# Altium PCB 6_LDCU_connector board(V21_zb).PcbDoc (part 1 of 4)
Units mil, origin at the board's own origin, x right, y up, seen from the top; angles counter-clockwise.
Board outline 11811.02 x 4135 mil, 2 copper layers (Top, Bottom), stack 12.7 mil thick; 37 components, 473 nets, 963 pads, 1 vias.
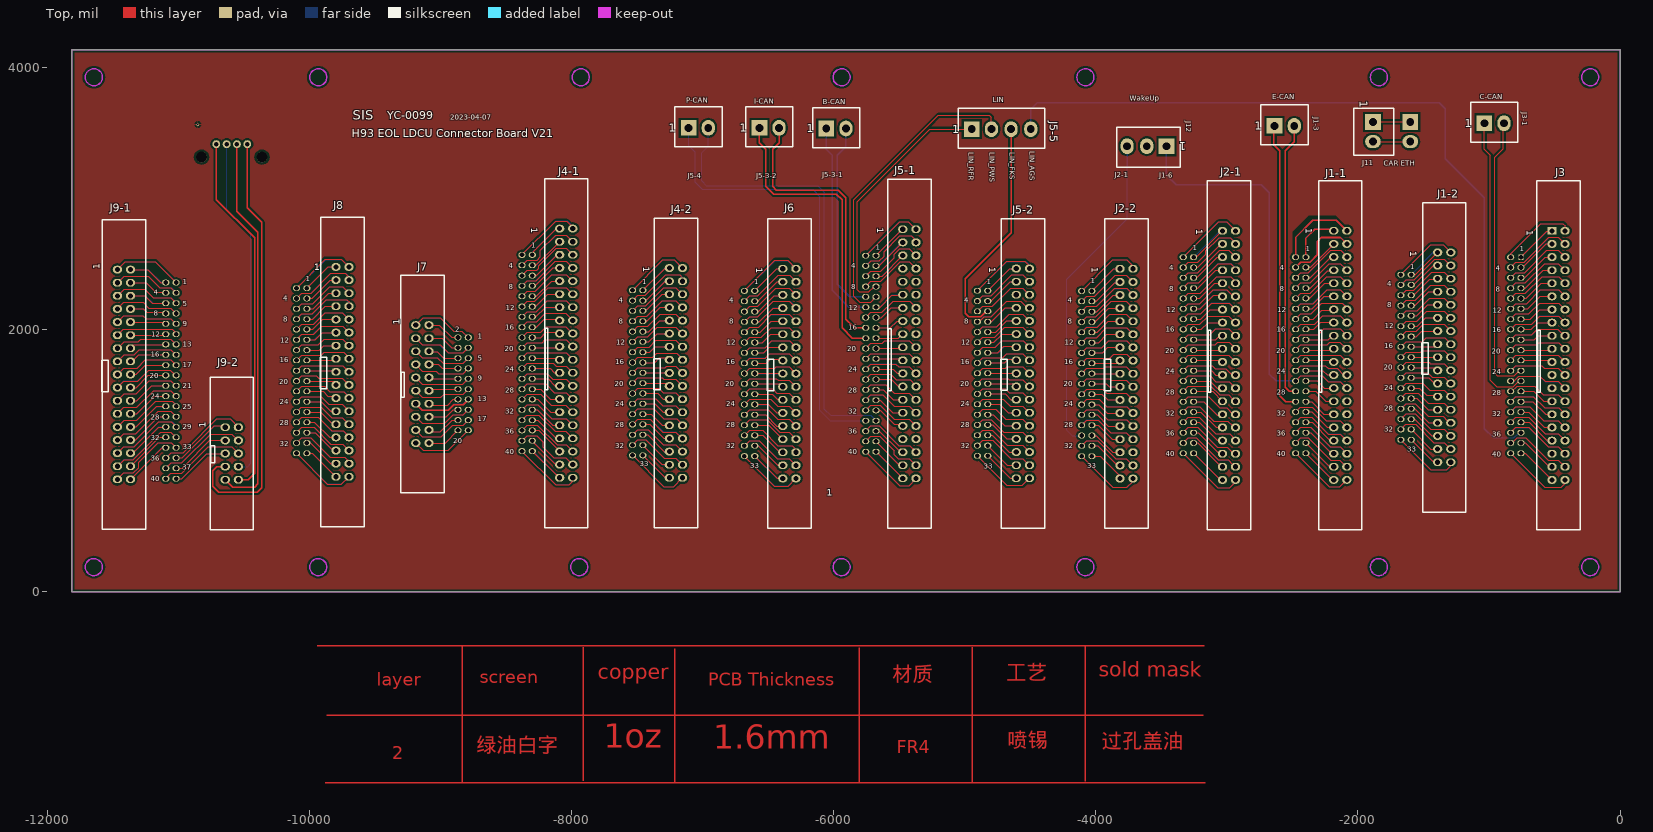
[diagram p0: Top view]
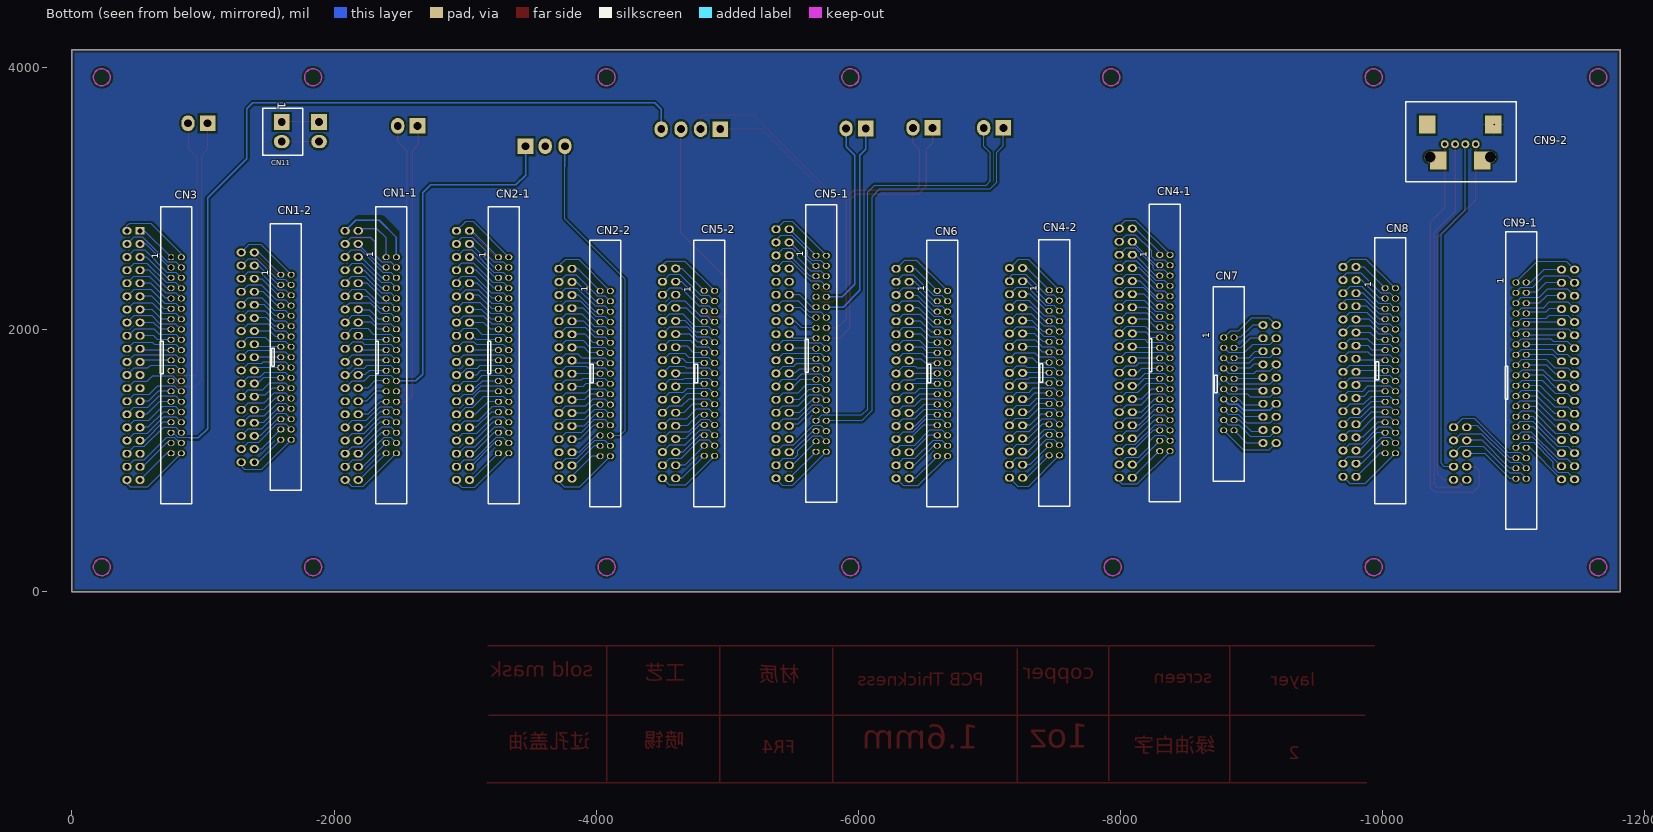
[diagram p1: Bottom view, seen from below]

## Layer stack, top to bottom
Top: signal copper 1.35
Dielectric: dielectric 10, FR-4, Dk 4.3
Bottom: signal copper 1.35

## Board outline
-11811.02,0 -11811.02,1320 -11811.02,4133.86 -11809.88,4135 -11716.02,4135 -1.14,4135 0,4133.86 0,4110 0,0 -61.02,0 -11811.02,0

## Design rules (kind name [scope] priority, off if disabled: settings)
Clearance "'Default' PADS rule_18" [All] p1: gap=6
Clearance "'Default' PADS rule_15" [IsVia vs IsVia] p2: gap=15
ComponentClearance "'Default' PADS rule_12" [All] p1: gap=6 collisioncheckmode=3 verticalgap=10 showdistances=FALSE
FlightTimeFalling "'Default' PADS rule_10" [All] p1: maximum=10.00
FlightTimeRising "'Default' PADS rule_9" [All] p1: maximum=10.00
Length "'Default' PADS rule_5" [All] p1: maxlimit=50000 minlimit=0
MatchedLengths "'Default' PADS rule_11" [InNetClass('All Nets')] p1: tolerance=200 checknetsindiffpair=TRUE checkdiffpairvsdiffpair=TRUE checkothers=TRUE
MaxMinImpedance "'Default' PADS rule_8" [All] p1: minimum=50.00 maximum=150.0
ParallelSegment "'Default' PADS rule_7" [All] p1: limit=1000 gap=200
ParallelSegment "'Default' PADS rule_6" [All] p2: limit=1000 gap=200
PlaneClearance "'Default' PADS rule_14" [All] p1: clearance=6
PlaneConnect "Power Plane Connect Style - pads with no thermal_22" [(Name='J5-4-3') Or (Name='J5-4-4') Or (Name='J5-4-9') Or (Name='J5-4-10') Or (Name='J5-5-3') Or (Name='J5-5-9') Or (Name='J5-5-10') Or (Name='U1-1') Or (Name='U10-1') Or (Name='U2-1') Or (Name='U3-1') Or (Name='U4-1') Or (Name='U5-1') Or (Name='U6-1') Or (Name='U7-1') Or (Name='U8-1') Or (Name='U9-1')] p1: planeconnectstyle=NoConnect reliefexpansion=20 reliefentries=4 reliefconductorwidth=10 reliefairgap=10 // PAD - No Thermal Connect Rule
PlaneConnect "Power Plane Connect Style - pads with no thermal_21" [(Name='J3-1-9') Or (Name='J3-1-10') Or (Name='J4-1-2') Or (Name='J4-1-4') Or (Name='J4-1-6') Or (Name='J4-1-8') Or (Name='J4-1-10') Or (Name='J4-1-12') Or (Name='J4-1-14') Or (Name='J4-1-16') Or (Name='J4-1-18') Or (Name='J4-1-20') Or (Name='J4-1-22') Or (Name='J4-1-24') Or (Name='J4-1-26') Or (Name='J4-1-28') Or (Name='J4-1-30') Or (Name='J4-1-32') Or (Name='J4-1-34') Or (Name='J4-1-36') Or (Name='J4-1-38') Or (Name='J4-1-40') Or (Name='J5-1-2') Or (Name='J5-1-4') Or (Name='J5-1-6') Or (Name='J5-1-8') Or (Name='J5-1-10') Or (Name='J5-1-12') Or (Name='J5-1-14') Or (Name='J5-1-16') Or (Name='J5-1-18') Or (Name='J5-1-20') Or (Name='J5-1-22') Or (Name='J5-1-24') Or (Name='J5-1-26') Or (Name='J5-1-28') Or (Name='J5-1-30') Or (Name='J5-1-32') Or (Name='J5-1-34') Or (Name='J5-1-36') Or (Name='J5-1-38') Or (Name='J5-1-40') Or (Name='J5-3-1') Or (Name='J5-3-2') Or (Name='J5-3-3') Or (Name='J5-3-4') Or (Name='J5-3-9') Or (Name='J5-3-10') Or (Name='J5-4-1')] p2: planeconnectstyle=NoConnect reliefexpansion=20 reliefentries=4 reliefconductorwidth=10 reliefairgap=10 // PAD - No Thermal Connect Rule
PlaneConnect "Power Plane Connect Style - pads with no thermal_20" [(Name='CN7-20') Or (Name='CN9-2-9') Or (Name='CN9-2-10') Or (Name='J11-9') Or (Name='J11-10') Or (Name='J1-3-1') Or (Name='J1-3-4') Or (Name='J1-3-9') Or (Name='J1-3-10') Or (Name='J2-1-2') Or (Name='J2-1-4') Or (Name='J2-1-6') Or (Name='J2-1-8') Or (Name='J2-1-10') Or (Name='J2-1-12') Or (Name='J2-1-14') Or (Name='J2-1-16') Or (Name='J2-1-18') Or (Name='J2-1-20') Or (Name='J2-1-22') Or (Name='J2-1-24') Or (Name='J2-1-26') Or (Name='J2-1-28') Or (Name='J2-1-30') Or (Name='J2-1-32') Or (Name='J2-1-34') Or (Name='J2-1-36') Or (Name='J2-1-38') Or (Name='J2-1-40') Or (Name='J3-2') Or (Name='J3-4') Or (Name='J3-6') Or (Name='J3-8') Or (Name='J3-10') Or (Name='J3-12') Or (Name='J3-14') Or (Name='J3-16') Or (Name='J3-18') Or (Name='J3-20') Or (Name='J3-22') Or (Name='J3-24') Or (Name='J3-26') Or (Name='J3-28') Or (Name='J3-30') Or (Name='J3-32') Or (Name='J3-34') Or (Name='J3-36') Or (Name='J3-38') Or (Name='J3-40') Or (Name='J3-1-1') Or (Name='J3-1-4')] p3: planeconnectstyle=NoConnect reliefexpansion=20 reliefentries=4 reliefconductorwidth=10 reliefairgap=10 // PAD - No Thermal Connect Rule
PlaneConnect "Power Plane Connect Style - pads with no thermal_19" [(Name='CN4-2-24') Or (Name='CN4-2-26') Or (Name='CN4-2-28') Or (Name='CN4-2-30') Or (Name='CN4-2-32') Or (Name='CN4-2-34') Or (Name='CN5-2-2') Or (Name='CN5-2-4') Or (Name='CN5-2-6') Or (Name='CN5-2-8') Or (Name='CN5-2-10') Or (Name='CN5-2-12') Or (Name='CN5-2-14') Or (Name='CN5-2-16') Or (Name='CN5-2-18') Or (Name='CN5-2-20') Or (Name='CN5-2-22') Or (Name='CN5-2-24') Or (Name='CN5-2-26') Or (Name='CN5-2-28') Or (Name='CN5-2-30') Or (Name='CN5-2-32') Or (Name='CN5-2-34') Or (Name='CN6-2') Or (Name='CN6-4') Or (Name='CN6-6') Or (Name='CN6-8') Or (Name='CN6-10') Or (Name='CN6-12') Or (Name='CN6-14') Or (Name='CN6-16') Or (Name='CN6-18') Or (Name='CN6-20') Or (Name='CN6-22') Or (Name='CN6-24') Or (Name='CN6-26') Or (Name='CN6-28') Or (Name='CN6-30') Or (Name='CN6-32') Or (Name='CN6-34') Or (Name='CN7-2') Or (Name='CN7-4') Or (Name='CN7-6') Or (Name='CN7-8') Or (Name='CN7-10') Or (Name='CN7-12') Or (Name='CN7-14') Or (Name='CN7-16') Or (Name='CN7-18')] p4: planeconnectstyle=NoConnect reliefexpansion=20 reliefentries=4 reliefconductorwidth=10 reliefairgap=10 // PAD - No Thermal Connect Rule
PlaneConnect "Power Plane Connect Style - pads with no thermal" [(Name='CN11-9') Or (Name='CN11-10') Or (Name='CN1-2-2') Or (Name='CN1-2-4') Or (Name='CN1-2-6') Or (Name='CN1-2-8') Or (Name='CN1-2-10') Or (Name='CN1-2-12') Or (Name='CN1-2-14') Or (Name='CN1-2-16') Or (Name='CN1-2-18') Or (Name='CN1-2-20') Or (Name='CN1-2-22') Or (Name='CN1-2-24') Or (Name='CN1-2-26') Or (Name='CN1-2-28') Or (Name='CN1-2-30') Or (Name='CN1-2-32') Or (Name='CN1-2-34') Or (Name='CN2-2-2') Or (Name='CN2-2-4') Or (Name='CN2-2-6') Or (Name='CN2-2-8') Or (Name='CN2-2-10') Or (Name='CN2-2-12') Or (Name='CN2-2-14') Or (Name='CN2-2-16') Or (Name='CN2-2-18') Or (Name='CN2-2-20') Or (Name='CN2-2-22') Or (Name='CN2-2-24') Or (Name='CN2-2-26') Or (Name='CN2-2-28') Or (Name='CN2-2-30') Or (Name='CN2-2-32') Or (Name='CN2-2-34') Or (Name='CN4-2-2') Or (Name='CN4-2-4') Or (Name='CN4-2-6') Or (Name='CN4-2-8') Or (Name='CN4-2-10') Or (Name='CN4-2-12') Or (Name='CN4-2-14') Or (Name='CN4-2-16') Or (Name='CN4-2-18') Or (Name='CN4-2-20') Or (Name='CN4-2-22')] p5: planeconnectstyle=NoConnect reliefexpansion=20 reliefentries=4 reliefconductorwidth=10 reliefairgap=10 // PAD - No Thermal Connect Rule
PlaneConnect "Power Plane Connect Style - from global settings" [All] p6: planeconnectstyle=Relief reliefexpansion=20 reliefentries=2 reliefconductorwidth=15 reliefairgap=10
PolygonConnect [All] p1: connectstyle=Relief reliefconductorwidth=10 reliefentries=4 polygonreliefangle="90 Angle"
RoutingLayers "'Default' PADS rule_3" [All] p1: top layer_v5=TRUE bottom layer_v5=TRUE
RoutingPriority "'Default' PADS rule_2" [All] p1: routingpriority=3
RoutingTopology "'Default' PADS rule" [All] p1: topology=Shortest
RoutingVias "'Default' PADS rule_4" [All] p1: holewidth=15.75 width=27.56 viastyle="Through Hole" minholewidth=15.75 minwidth=27.56 maxholewidth=15.75 maxwidth=27.56
SMDToCorner "'Default' PADS rule_16" [All] p1: distance=60000
SMDToPlane "'Default' PADS rule_17" [All] p1: distance=60000
SilkscreenOverComponentPads [All] p1: minsilkscreentomaskgap=10
SolderMaskExpansion [All] p1: expansion=4
Width "'Default' PADS rule_13" [All] p1: maxlimit=118.11 minlimit=6 preferedwidth=7.87
21 further rules are at their usual default settings.

## Components (designator, comment, footprint, x,y, rotation, side; value= is the part's Value field where it differs from the comment)
CN1-1 "IDC40-2.0" IDC40-2.0#1 -2436.81,2553.74 r270 bottom
CN1-2 "IDC34-2.0" IDC34-2.0 -1633.43,2420.35 r270 bottom
CN2-1 "IDC40-2.0" IDC40-2.0#1 -3293.66,2553.46 r270 bottom
CN2-2 "IDC34-2.0" IDC34-2.0 -4068.9,2295.35 r270 bottom
CN3 "IDC40-2.0" IDC40-2.0#2 -795.94,2553.46 r270 bottom
CN4-1 "IDC40-2.0" IDC40-2.0#1 -8337.87,2570.47 r270 bottom
CN4-2 "IDC34-2.0" IDC34-2.0 -7494.49,2301.02 r270 bottom
CN5-1 "IDC40-2.0" IDC40-2.0#1 -5716.1,2565.47 r270 bottom
CN5-2 "IDC34-2.0" IDC34-2.0 -4863.46,2297.36 r270 bottom
CN6 "IDC34-2.0" IDC34-2.0 -6640.83,2296.02 r270 bottom
CN7 "IDC20-2.0" IDC20-2.0 -8826.18,1940.83 r270 bottom
CN8 "IDC34-2.0" IDC34-2.0 -10057.68,2317.13 r270 bottom
CN9-1 "IDC40-2.0" IDC40-2.0#1 -11055.31,2360.12 r270 bottom
CN9-2 "34792002" 34792002 -10591.02,3315 r180 bottom
CN11 "Comment" 3.81mm-2 -1601.02,3585 r270 bottom
J1-1 "CON40A" CON40A#1 -2184.84,2754.53 r270 top
J1-2 "IDC34-2.54" IDC34-2.54 -1342.09,2589.65 r270 top
J1-3 "Comment" 3.81mm-2 -2636.02,3555 r0 top
J2-1 "CON40A" CON40A#1 -3033.82,2754.25 r270 top
J2-2 "IDC34-2.54" IDC34-2.54 -3765.75,2464.65 r270 top
J3 "CON40A" CON40A#2 -520.35,2754.25 r270 top
J3-1 "Comment" 3.81mm-2 -1036.02,3575 r0 top
J4-1 "CON40A" CON40A#1 -8089.84,2771.26 r270 top
J4-2 "IDC34-2.54" IDC34-2.54 -7203.15,2470.32 r270 top
J5-1 "CON40A" CON40A#1 -5472.01,2766.26 r270 top
J5-2 "IDC34-2.54" IDC34-2.54 -4556.38,2466.65 r270 top
J5-3-1 "Comment" 3.81mm-2 -6056.02,3535 r0 top
J5-3-2 "Comment" 3.81mm-2 -6566.02,3540 r0 top
J5-4 "Comment" 3.81mm-2 -7106.02,3540 r0 top
J5-5 "Comment" 3.81mm-4 -4946.02,3530 r0 top
J6 "IDC34-2.54" IDC34-2.54 -6337.68,2465.32 r270 top
J7 "IDC20-2.54" IDC20-2.54 -9137.2,2035.32 r270 top
J8 "IDC34-2.54" IDC34-2.54 -9746.65,2478.54 r270 top
J9-1 "IDC34-2.54" IDC34-2.54 -11413.58,2458.54 r270 top
J9-2 "IDC10-2.54" IDC10-2.54 -10590.75,1255.63 r270 top
J11 "Comment" 3.81mm-2 -1886.02,3585 r270 top
J12 "Comment" 3.81mm-3 -3461.02,3400 r180 top

## Footprints (in the part's own frame and the unit in brackets; to place one, negate y for a bottom-side part, rotate by r counter-clockwise, add the part's x,y. Pads: shape width x height; smd on the part's side, far side on the other; paste and mask are expansions set on the pad)
3.81mm-2 [mil]
  rect 120x120 hole 60: 1(0,0)
  oval 100x120 hole 60: 2(150,0)
  silkscreen extent -105,-145 255,160
3.81mm-3 [mil]
  rect 120x120 hole 60: 1(0,0)
  oval 100x120 hole 60: 2(150,0) 3(300,0)
  silkscreen extent -105,-145 381,160
3.81mm-4 [mil]
  rect 120x120 hole 60: 1(0,0)
  oval 100x120 hole 60: 2(150,0) 3(300,0) 4(450,0)
  silkscreen extent -105,-145 555,160
34792002 [mm]
  round 1.524 hole 0.889: 1(-3,2.55) 2(-1,2.55) 3(1,2.55) 4(3,2.55)
  rect 3.2x3.48 smd: 5(-4.25,-0.62) 6(4.25,-0.62) 7(-6.4,6.34) 8(6.4,6.34)
  round 2.16 / inner round 2 / far side round 2 hole 2.16 unplated: 9(-5.84,0.04) 10(5.85,0.04)
  silkscreen extent -10.59,-4.75 10.87,10.8
CON40A#1 [mm]
  oval 1.5x1.8 hole 1: 1(0,0) 2(0,2.54) 3(2.54,0) 4(2.54,2.54) 5(5.08,0) 6(5.08,2.54) 7(7.62,0) 8(7.62,2.54) 9(10.16,0) 10(10.16,2.54) 11(12.7,0) 12(12.7,2.54) 13(15.24,0) 14(15.24,2.54) 15(17.78,0) 16(17.78,2.54) 17(20.32,0) 18(20.32,2.54) 19(22.86,0) 20(22.86,2.54) 21(25.4,0) 22(25.4,2.54) 23(27.94,0) 24(27.94,2.54) 25(30.48,0) 26(30.48,2.54) 27(33.02,0) 28(33.02,2.54) 29(35.56,0) 30(35.56,2.54) 31(38.1,0) 32(38.1,2.54) 33(40.64,0) 34(40.64,2.54) 35(43.18,0) 36(43.18,2.54) 37(45.72,0) 38(45.72,2.54) 39(48.26,0) 40(48.26,2.54)
  silkscreen extent -9.66,-2.93 57.92,5.47
CON40A#2 [mm]
  rect 1.5x1.8 hole 1: 1(0,0)
  oval 1.5x1.8 hole 1: 2(0,2.54) 3(2.54,0) 4(2.54,2.54) 5(5.08,0) 6(5.08,2.54) 7(7.62,0) 8(7.62,2.54) 9(10.16,0) 10(10.16,2.54) 11(12.7,0) 12(12.7,2.54) 13(15.24,0) 14(15.24,2.54) 15(17.78,0) 16(17.78,2.54) 17(20.32,0) 18(20.32,2.54) 19(22.86,0) 20(22.86,2.54) 21(25.4,0) 22(25.4,2.54) 23(27.94,0) 24(27.94,2.54) 25(30.48,0) 26(30.48,2.54) 27(33.02,0) 28(33.02,2.54) 29(35.56,0) 30(35.56,2.54) 31(38.1,0) 32(38.1,2.54) 33(40.64,0) 34(40.64,2.54) 35(43.18,0) 36(43.18,2.54) 37(45.72,0) 38(45.72,2.54) 39(48.26,0) 40(48.26,2.54)
  silkscreen extent -9.66,-2.93 57.92,5.47
IDC10-2.54 [mm]
  oval 1.5x1.8 hole 1: 1(0,-1.27) 2(0,1.27) 3(2.54,-1.27) 4(2.54,1.27) 5(5.08,-1.27) 6(5.08,1.27) 7(7.62,-1.27) 8(7.62,1.27) 9(10.16,-1.27) 10(10.16,1.27)
  silkscreen extent -9.66,-4.2 19.82,4.2
IDC20-2.0 [mm]
  oval 1.1x1.4 hole 0.889: 1(0,-1) 2(0,1) 3(2,-1) 4(2,1) 5(4,-1) 6(4,1) 7(6,-1) 8(6,1) 9(8,-1) 10(8,1) 11(10,-1) 12(10,1) 13(12,-1) 14(12,1) 15(14,-1) 16(14,1) 17(16,-1) 18(16,1) 19(18,-1) 20(18,1)
  silkscreen extent -9.81,-3 27.81,3
IDC20-2.54 [mm]
  oval 1.5x1.8 hole 1: 1(0,-1.27) 2(0,1.27) 3(2.54,-1.27) 4(2.54,1.27) 5(5.08,-1.27) 6(5.08,1.27) 7(7.62,-1.27) 8(7.62,1.27) 9(10.16,-1.27) 10(10.16,1.27) 11(12.7,-1.27) 12(12.7,1.27) 13(15.24,-1.27) 14(15.24,1.27) 15(17.78,-1.27) 16(17.78,1.27) 17(20.32,-1.27) 18(20.32,1.27) 19(22.86,-1.27) 20(22.86,1.27)
  silkscreen extent -9.66,-4.2 32.52,4.2
IDC34-2.0 [mm]
  oval 1.1x1.4 hole 0.889: 1(0,-1) 2(0,1) 3(2,-1) 4(2,1) 5(4,-1) 6(4,1) 7(6,-1) 8(6,1) 9(8,-1) 10(8,1) 11(10,-1) 12(10,1) 13(12,-1) 14(12,1) 15(14,-1) 16(14,1) 17(16,-1) 18(16,1) 19(18,-1) 20(18,1) 21(20,-1) 22(20,1) 23(22,-1) 24(22,1) 25(24,-1) 26(24,1) 27(26,-1) 28(26,1) 29(28,-1) 30(28,1) 31(30,-1) 32(30,1) 33(32,-1) 34(32,1)
  silkscreen extent -9.81,-3 41.81,3
IDC34-2.54 [mm]
  oval 1.5x1.8 hole 1: 1(0,-1.27) 2(0,1.27) 3(2.54,-1.27) 4(2.54,1.27) 5(5.08,-1.27) 6(5.08,1.27) 7(7.62,-1.27) 8(7.62,1.27) 9(10.16,-1.27) 10(10.16,1.27) 11(12.7,-1.27) 12(12.7,1.27) 13(15.24,-1.27) 14(15.24,1.27) 15(17.78,-1.27) 16(17.78,1.27) 17(20.32,-1.27) 18(20.32,1.27) 19(22.86,-1.27) 20(22.86,1.27) 21(25.4,-1.27) 22(25.4,1.27) 23(27.94,-1.27) 24(27.94,1.27) 25(30.48,-1.27) 26(30.48,1.27) 27(33.02,-1.27) 28(33.02,1.27) 29(35.56,-1.27) 30(35.56,1.27) 31(38.1,-1.27) 32(38.1,1.27) 33(40.64,-1.27) 34(40.64,1.27)
  silkscreen extent -9.66,-4.32 50.3,4.2
IDC40-2.0#1 [mm]
  oval 1.1x1.4 hole 0.889: 1(0,-1) 2(0,1) 3(2,-1) 4(2,1) 5(4,-1) 6(4,1) 7(6,-1) 8(6,1) 9(8,-1) 10(8,1) 11(10,-1) 12(10,1) 13(12,-1) 14(12,1) 15(14,-1) 16(14,1) 17(16,-1) 18(16,1) 19(18,-1) 20(18,1) 21(20,-1) 22(20,1) 23(22,-1) 24(22,1) 25(24,-1) 26(24,1) 27(26,-1) 28(26,1) 29(28,-1) 30(28,1) 31(30,-1) 32(30,1) 33(32,-1) 34(32,1) 35(34,-1) 36(34,1) 37(36,-1) 38(36,1) 39(38,-1) 40(38,1)
  silkscreen extent -9.81,-3.05 47.81,3
IDC40-2.0#2 [mm]
  rect 1x1 hole 0.889: 1(0,-1)
  oval 1.1x1.4 hole 0.889: 2(0,1) 3(2,-1) 4(2,1) 5(4,-1) 6(4,1) 7(6,-1) 8(6,1) 9(8,-1) 10(8,1) 11(10,-1) 12(10,1) 13(12,-1) 14(12,1) 15(14,-1) 16(14,1) 17(16,-1) 18(16,1) 19(18,-1) 20(18,1) 21(20,-1) 22(20,1) 23(22,-1) 24(22,1) 25(24,-1) 26(24,1) 27(26,-1) 28(26,1) 29(28,-1) 30(28,1) 31(30,-1) 32(30,1) 33(32,-1) 34(32,1) 35(34,-1) 36(34,1) 37(36,-1) 38(36,1) 39(38,-1) 40(38,1)
  silkscreen extent -9.81,-3.05 47.81,3

## Via types
v1: diameter 20, hole 14, Top to Bottom, 1 vias

## Nets (pads, with @x,y where several pads share a name; then routed paths per layer and width w, separated by ;. In a path a pad name is that pad's centre, name@x,y a point inside that pad or via, vN(x,y) a via of type N, cw(c..) or ccw(c..) an arc to the next point about the centre after c; other vN are vias at no path point)
CN1-2_P1: CN1-2.1 J1-2.1 | length 547.1
  Top w7.87: CN1-2.1@-1594.06,2420.35 -1561.38,2420.35 J1-2.1@-1392.09,2589.65
  Bottom w7.87: CN1-2.1@-1594.06,2420.35 -1421.22,2593.19 -1417.68,2589.65 J1-2.1@-1392.09,2589.65
CN1-2_P2: CN1-2.2 J1-2.2 | length 997.6
  Top w7.87: CN1-2.2@-1672.8,2420.35 -1445.63,2647.52 -1349.96,2647.52 J1-2.2@-1292.09,2589.65
  Bottom w7.87: CN1-2.2@-1672.8,2420.35 -1445.63,2647.52 -1349.96,2647.52 J1-2.2@-1292.09,2589.65
CN1-2_P3: CN1-2.3 J1-2.3 | length 526.6
  Top w7.87: CN1-2.3@-1594.06,2341.61 -1572.8,2341.61 -1424.76,2489.65 J1-2.3@-1392.09,2489.65
  Bottom w7.87: CN1-2.3@-1594.06,2341.61 -1572.8,2341.61 -1424.76,2489.65 J1-2.3@-1392.09,2489.65
CN1-2_P4: CN1-2.4 J1-2.4 | length 965.3
  Top w7.87: CN1-2.4@-1672.8,2341.61 -1633.43,2380.98 -1570.43,2380.98 -1412.95,2538.46 -1340.91,2538.46 J1-2.4@-1292.09,2489.65
  Bottom w7.87: CN1-2.4@-1672.8,2341.61 -1633.43,2380.98 -1571.22,2380.98 -1413.35,2538.86 -1341.3,2538.86 J1-2.4@-1292.09,2489.65
CN1-2_P5: CN1-2.5 J1-2.5 | length 511.7
  Top w7.87: CN1-2.5@-1594.06,2262.87 -1575.16,2262.87 -1453.11,2384.92 -1396.81,2384.92 J1-2.5@-1392.09,2389.65
  Bottom w7.87: CN1-2.5@-1594.06,2262.87 -1575.16,2262.87 -1453.11,2384.92 -1392.09,2384.92 J1-2.5@-1392.09,2389.65
CN1-2_P6: CN1-2.6 J1-2.6 | length 949.9
  Top w7.87: CN1-2.6@-1672.8,2262.87 -1633.43,2302.24 -1574.37,2302.24 -1436.57,2440.04 -1342.48,2440.04 J1-2.6@-1292.09,2389.65
  Bottom w7.87: CN1-2.6@-1672.8,2262.87 -1633.43,2302.24 -1574.37,2302.24 -1436.57,2440.04 -1342.48,2440.04 J1-2.6@-1292.09,2389.65
CN1-2_P7: CN1-2.7 J1-2.7 | length 491.3
  Top w7.87: CN1-2.7@-1594.06,2184.13 -1566.5,2184.13 -1460.98,2289.65 J1-2.7@-1392.09,2289.65
  Bottom w7.87: CN1-2.7@-1594.06,2184.13 -1566.5,2184.13 -1460.98,2289.65 J1-2.7@-1392.09,2289.65
CN1-2_P8: CN1-2.8 J1-2.8 | length 931.7
  Top w7.87: CN1-2.8@-1672.8,2184.13 -1633.43,2223.5 -1562.56,2223.5 -1446.42,2339.65 -1342.09,2339.65 J1-2.8@-1292.09,2289.65
  Bottom w7.87: CN1-2.8@-1672.8,2184.13 -1633.43,2223.5 -1563.35,2223.5 -1447.2,2339.65 -1342.09,2339.65 J1-2.8@-1292.09,2289.65
CN1-2_P9: CN1-2.9 J1-2.9 | length 473.7
  Top w7.87: CN1-2.9@-1594.06,2105.39 -1550.75,2105.39 -1466.5,2189.65 J1-2.9@-1392.09,2189.65
  Bottom w7.87: CN1-2.9@-1594.06,2105.39 -1550.35,2105.39 -1466.1,2189.65 J1-2.9@-1392.09,2189.65
CN1-2_P10: CN1-2.10 J1-2.10 | length 913.7
  Top w7.87: CN1-2.10@-1672.8,2105.39 -1633.43,2144.76 -1546.81,2144.76 -1452.32,2239.25 -1342.09,2239.25 -1322.4,2219.57 -1322.01,2219.57 J1-2.10@-1292.09,2189.65
  Bottom w7.87: CN1-2.10@-1672.8,2105.39 -1633.43,2144.76 -1546.02,2144.76 -1451.14,2239.65 -1342.09,2239.65 J1-2.10@-1292.09,2189.65
CN1-2_P11: CN1-2.11 J1-2.11 | length 456.1
  Top w7.87: CN1-2.11@-1594.06,2026.65 -1546.81,2026.65 -1483.82,2089.65 J1-2.11@-1392.09,2089.65
  Bottom w7.87: CN1-2.11@-1594.06,2026.65 -1546.81,2026.65 -1483.82,2089.65 J1-2.11@-1392.09,2089.65
CN1-2_P12: CN1-2.12 J1-2.12 | length 898.1
  Top w7.87: CN1-2.12@-1672.8,2026.65 -1633.43,2066.02 -1550.75,2066.02 -1475.94,2140.83 -1343.27,2140.83 J1-2.12@-1292.09,2089.65
  Bottom w7.87: CN1-2.12@-1672.8,2026.65 -1633.43,2066.02 -1549.57,2066.02 -1475.16,2140.43 -1342.87,2140.43 J1-2.12@-1292.09,2089.65
CN1-2_P13: CN1-2.13 J1-2.13 | length 438.5
  Top w7.87: CN1-2.13@-1594.06,1947.91 -1554.69,1947.91 -1512.95,1989.65 J1-2.13@-1392.09,1989.65
  Bottom w7.87: CN1-2.13@-1594.06,1947.91 -1555.47,1947.91 -1513.74,1989.65 J1-2.13@-1392.09,1989.65
CN1-2_P14: CN1-2.14 J1-2.14 | length 880.8
  Top w7.87: CN1-2.14@-1672.8,1947.91 -1633.43,1987.28 -1554.69,1987.28 -1501.14,2040.83 -1343.27,2040.83 J1-2.14@-1292.09,1989.65
  Bottom w7.87: CN1-2.14@-1672.8,1947.91 -1633.43,1987.28 -1554.69,1987.28 -1501.14,2040.83 -1343.27,2040.83 J1-2.14@-1292.09,1989.65
CN1-2_P15: CN1-2.15 J1-2.15 | length 425.3
  Top w7.87: CN1-2.15@-1594.06,1869.17 -1412.56,1869.17 J1-2.15@-1392.09,1889.65
  Bottom w7.87: CN1-2.15@-1594.06,1869.17 -1405.08,1869.17 -1392.09,1882.17 J1-2.15@-1392.09,1889.65
CN1-2_P16: CN1-2.16 J1-2.16 | length 871
  Top w7.87: CN1-2.16@-1672.8,1869.17 -1633.43,1908.54 -1511.38,1908.54 -1479.88,1940.04 -1338.15,1940.04 -1292.09,1893.98 J1-2.16@-1292.09,1889.65
  Bottom w7.87: CN1-2.16@-1672.8,1869.17 -1633.43,1908.54 -1511.38,1908.54 -1479.49,1940.43 -1336.57,1940.43 -1288.94,1892.8 J1-2.16@-1292.09,1889.65
CN1-2_P17: CN1-2.17 J1-2.17 | length 424.1
  Top w7.87: CN1-2.17@-1594.06,1790.43 -1397.2,1790.43 -1397.2,1778.62 -1392.09,1783.74 J1-2.17@-1392.09,1789.65
  Bottom w7.87: CN1-2.17@-1594.06,1790.43 -1400.75,1790.43 -1399.96,1789.65 J1-2.17@-1392.09,1789.65
CN1-2_P18: CN1-2.18 J1-2.18 | length 844.9
  Top w7.87: CN1-2.18@-1672.8,1790.43 -1633.43,1829.8 -1519.25,1829.8 -1508.62,1840.43 -1342.87,1840.43 J1-2.18@-1292.09,1789.65
  Bottom w7.87: CN1-2.18@-1672.8,1790.43 -1633.43,1829.8 -1522.8,1829.8 -1512.17,1840.43 -1342.87,1840.43 J1-2.18@-1292.09,1789.65
CN1-2_P19: CN1-2.19 J1-2.19 | length 423.6
  Top w7.87: CN1-2.19@-1594.06,1711.69 -1414.13,1711.69 J1-2.19@-1392.09,1689.65
  Bottom w7.87: CN1-2.19@-1594.06,1711.69 -1411.77,1711.69 -1394.45,1694.37 -1394.45,1692.01 J1-2.19@-1392.09,1689.65
CN1-2_P20: CN1-2.20 J1-2.20 | length 845.2
  Top w7.87: CN1-2.20@-1672.8,1711.69 -1633.43,1751.06 -1457.05,1751.06 -1446.81,1740.83 -1343.27,1740.83 J1-2.20@-1292.09,1689.65
  Bottom w7.87: CN1-2.20@-1672.8,1711.69 -1633.03,1751.46 -1457.05,1751.46 -1446.42,1740.83 -1343.27,1740.83 J1-2.20@-1292.09,1689.65
CN1-2_P21: CN1-2.21 J1-2.21 | length 450.9
  Top w7.87: CN1-2.21@-1594.06,1632.95 -1459.02,1632.95 -1403.9,1577.83 J1-2.21@-1392.09,1589.65
  Bottom w7.87: CN1-2.21@-1594.06,1632.95 -1458.62,1632.95 -1413.74,1588.07 -1393.66,1588.07 J1-2.21@-1392.09,1589.65
CN1-2_P22: CN1-2.22 J1-2.22 | length 862.5
  Top w7.87: CN1-2.22@-1672.8,1632.95 -1633.43,1672.32 -1467.68,1672.32 -1434.61,1639.25 -1341.69,1639.25 J1-2.22@-1292.09,1589.65
  Bottom w7.87: CN1-2.22@-1672.8,1632.95 -1633.43,1672.32 -1467.68,1672.32 -1434.61,1639.25 -1341.69,1639.25 J1-2.22@-1292.09,1589.65
CN1-2_P23: CN1-2.23 J1-2.23 | length 460.9
  Top w7.87: CN1-2.23@-1594.06,1554.21 -1531.06,1554.21 -1475.94,1499.09 -1401.54,1499.09 J1-2.23@-1392.09,1489.65
  Bottom w7.87: CN1-2.23@-1594.06,1554.21 -1529.09,1554.21 -1473.19,1498.31 -1394.84,1498.31 -1394.84,1492.4 J1-2.23@-1392.09,1489.65
CN1-2_P24: CN1-2.24 J1-2.24 | length 880.1
  Top w7.87: CN1-2.24@-1672.8,1554.21 -1633.43,1593.58 -1505.87,1593.58 -1451.93,1539.65 -1342.09,1539.65 J1-2.24@-1292.09,1489.65
  Bottom w7.87: CN1-2.24@-1672.8,1554.21 -1633.43,1593.58 -1505.47,1593.58 -1451.54,1539.65 -1342.48,1539.65 -1292.48,1489.65 J1-2.24@-1292.09,1489.65
CN1-2_P25: CN1-2.25 J1-2.25 | length 475
  Top w7.87: CN1-2.25@-1594.06,1475.47 -1550.75,1475.47 -1464.92,1389.65 J1-2.25@-1392.09,1389.65
  Bottom w7.87: CN1-2.25@-1594.06,1475.47 -1550.75,1475.47 -1464.92,1389.65 J1-2.25@-1392.09,1389.65
CN1-2_P26: CN1-2.26 J1-2.26 | length 898.1
  Top w7.87: CN1-2.26@-1672.8,1475.47 -1634.21,1514.06 -1539.33,1514.06 -1463.74,1438.46 -1340.91,1438.46 J1-2.26@-1292.09,1389.65
  Bottom w7.87: CN1-2.26@-1672.8,1475.47 -1632.24,1516.02 -1540.91,1516.02 -1463.35,1438.46 -1340.91,1438.46 J1-2.26@-1292.09,1389.65
CN1-2_P27: CN1-2.27 J1-2.27 | length 492.7
  Top w7.87: CN1-2.27@-1594.06,1396.73 -1566.5,1396.73 -1459.41,1289.65 J1-2.27@-1392.09,1289.65
  Bottom w7.87: CN1-2.27@-1594.06,1396.73 -1566.1,1396.73 -1459.02,1289.65 J1-2.27@-1392.09,1289.65
CN1-2_P28: CN1-2.28 J1-2.28 | length 915
  Top w7.87: CN1-2.28@-1672.8,1396.73 -1633.43,1436.1 -1562.56,1436.1 -1465.31,1338.86 -1351.14,1338.86 -1318.46,1306.18 -1308.62,1306.18 J1-2.28@-1292.09,1289.65
  Bottom w7.87: CN1-2.28@-1672.8,1396.73 -1633.82,1435.71 -1561.38,1435.71 -1464.53,1338.86 -1351.54,1338.86 -1302.32,1289.65 J1-2.28@-1292.09,1289.65
CN1-2_P29: CN1-2.29 J1-2.29 | length 510.3
  Top w7.87: CN1-2.29@-1594.06,1317.99 -1566.1,1317.99 -1438.15,1190.04 -1422.4,1190.04 -1422.01,1189.65 J1-2.29@-1392.09,1189.65
  Bottom w7.87: CN1-2.29@-1594.06,1317.99 -1565.31,1317.99 -1436.97,1189.65 J1-2.29@-1392.09,1189.65
CN1-2_P30: CN1-2.30 J1-2.30 | length 934.3
  Top w7.87: CN1-2.30@-1672.8,1317.99 -1633.03,1357.76 -1562.17,1357.76 -1444.45,1240.04 -1342.48,1240.04 J1-2.30@-1292.09,1189.65
  Bottom w7.87: CN1-2.30@-1672.8,1317.99 -1632.24,1358.54 -1561.77,1358.54 -1444.06,1240.83 -1343.27,1240.83 J1-2.30@-1292.09,1189.65
CN1-2_P31: CN1-2.31 J1-2.31 | length 527.9
  Top w7.87: CN1-2.31@-1594.06,1239.25 -1444.45,1089.65 J1-2.31@-1392.09,1089.65
  Bottom w7.87: CN1-2.31@-1594.06,1239.25 -1444.45,1089.65 J1-2.31@-1392.09,1089.65
CN1-2_P32: CN1-2.32 J1-2.32 | length 949.3
  Top w7.87: CN1-2.32@-1672.8,1239.25 -1634.21,1277.83 -1560.98,1277.83 -1422.8,1139.65 -1342.09,1139.65 J1-2.32@-1292.09,1089.65
  Bottom w7.87: CN1-2.32@-1672.8,1239.25 -1634.21,1277.83 -1559.8,1277.83 -1421.61,1139.65 -1342.09,1139.65 J1-2.32@-1292.09,1089.65
CN1-2_P33: CN1-2.33 J1-2.33 | length 546.1
  Top w7.87: CN1-2.33@-1594.06,1160.51 -1423.19,989.65 J1-2.33@-1392.09,989.65
  Bottom w7.87: CN1-2.33@-1594.06,1160.51 -1422.4,988.86 -1392.87,988.86 J1-2.33@-1392.09,989.65
CN1-2_P34: CN1-2.34 J1-2.34 | length 1033.2
  Top w7.87: CN1-2.34@-1672.8,1160.51 -1445.24,932.95 -1321.61,932.95 -1292.09,962.48 J1-2.34@-1292.09,989.65
  Bottom w7.87: CN1-2.34@-1672.8,1160.51 -1445.63,933.35 -1320.83,933.35 -1286.57,967.6 -1292.09,973.11 J1-2.34@-1292.09,989.65
CN1_1: CN1-1.1 J1-1.1 | length 796.5
  Top w11.81: CN1-1.1@-2397.44,2553.74 -2397.44,2699.41 -2330.51,2766.34 -2196.65,2766.34 J1-1.1@-2184.84,2754.53
  Bottom w7.87: CN1-1.1@-2397.44,2553.74 -2397.44,2699.8 -2325.39,2771.85 -2198.62,2771.85 -2188.39,2761.61 -2188.39,2750.59 -2184.84,2754.13 J1-1.1@-2184.84,2754.53
CN1_2: CN1-1.2 J1-1.2 | length 1258.2
  Top w11.81: CN1-1.2@-2476.18,2553.74 -2476.18,2703.82 -2345,2835 -2165.31,2835 J1-1.2@-2084.84,2754.53
  Bottom w11.81: CN1-1.2@-2476.18,2553.74 -2476.18,2703.82 -2345,2835 -2165.31,2835 J1-1.2@-2084.84,2754.53
CN1_3: CN1-1.3 J1-1.3 | length 576.5
  Top w7.87: CN1-1.3@-2397.44,2475 -2362.01,2475 -2192.72,2644.29 -2192.72,2646.65 J1-1.3@-2184.84,2654.53
  Bottom w7.87: CN1-1.3@-2397.44,2475 -2362.4,2475 -2184.84,2652.56 J1-1.3@-2184.84,2654.53
CN1_4: CN1-1.4 J1-1.4 | length 1135.7
  Top w11.81: CN1-1.4@-2476.18,2475 -2436.81,2514.37 -2367.91,2514.37 -2357.28,2525 -2310.83,2571.46 -2310.83,2671.85 -2279.33,2703.35 -2133.66,2703.35 J1-1.4@-2084.84,2654.53
  Bottom w7.87: CN1-1.4@-2476.18,2475 -2436.81,2514.37 -2366.73,2514.37 -2313.58,2567.52 -2313.58,2671.46 -2281.69,2703.35 -2127.36,2703.35 -2085.63,2661.61 -2085.63,2655.32 J1-1.4@-2084.84,2654.53
CN1_5: CN1-1.5 J1-1.5 | length 570.5
  Top w7.87: CN1-1.5@-2397.44,2396.26 -2365.94,2396.26 -2208.46,2553.74 -2185.63,2553.74 J1-1.5@-2184.84,2554.53
  Bottom w7.87: CN1-1.5@-2397.44,2396.26 -2364.76,2396.26 -2201.77,2559.25 -2184.45,2559.25 -2179.72,2554.53 J1-1.5@-2184.84,2554.53
CN1_6: CN1-1.6 J1-1.6 | length 1005.9
  Top w7.87: CN1-1.6@-2476.18,2396.26 -2436.81,2435.63 -2378.15,2435.63 -2208.86,2604.92 -2129.72,2604.92 -2084.84,2560.04 J1-1.6@-2084.84,2554.53
  Bottom w7.87: CN1-1.6@-2476.18,2396.26 -2436.42,2436.02 -2376.97,2436.02 -2208.07,2604.92 -2127.76,2604.92 -2083.66,2560.83 -2083.66,2555.71 J1-1.6@-2084.84,2554.53
CN1_7: CN1-1.7 J1-1.7 | length 540.8
  Top w7.87: CN1-1.7@-2397.44,2317.52 -2365.94,2317.52 -2232.09,2451.38 -2187.99,2451.38 J1-1.7@-2184.84,2454.53
  Bottom w7.87: CN1-1.7@-2397.44,2317.52 -2365.94,2317.52 -2232.87,2450.59 -2185.24,2450.59 -2184.84,2450.98 J1-1.7@-2184.84,2454.53
CN1_8: CN1-1.8 J1-1.8 | length 976.4
  Top w7.87: CN1-1.8@-2476.18,2317.52 -2436.81,2356.89 -2365.94,2356.89 -2220.28,2502.56 -2133.66,2502.56 -2102.17,2471.06 -2101.38,2471.06 J1-1.8@-2084.84,2454.53
  Bottom w7.87: CN1-1.8@-2476.18,2317.52 -2436.42,2357.28 -2365.94,2357.28 -2219.88,2503.35 -2134.84,2503.35 -2086.02,2454.53 J1-1.8@-2084.84,2454.53
CN1_9: CN1-1.9 J1-1.9 | length 521.1
  Top w7.87: CN1-1.9@-2397.44,2238.78 -2369.09,2238.78 -2253.35,2354.53 J1-1.9@-2184.84,2354.53
  Bottom w7.87: CN1-1.9@-2397.44,2238.78 -2368.7,2238.78 -2252.95,2354.53 J1-1.9@-2184.84,2354.53
CN1_10: CN1-1.10 J1-1.10 | length 966.8
  Top w7.87: CN1-1.10@-2476.18,2238.78 -2436.81,2278.15 -2365.94,2278.15 -2239.17,2404.92 -2135.24,2404.92 J1-1.10@-2084.84,2354.53
  Bottom w7.87: CN1-1.10@-2476.18,2238.78 -2436.81,2278.15 -2365.55,2278.15 -2238.78,2404.92 -2130.51,2404.92 -2082.48,2356.89 J1-1.10@-2084.84,2354.53
CN1_11: CN1-1.11 J1-1.11 | length 503.5
  Top w7.87: CN1-1.11@-2397.44,2160.04 -2350.2,2160.04 -2255.71,2254.53 J1-1.11@-2184.84,2254.53
  Bottom w7.87: CN1-1.11@-2397.44,2160.04 -2350.98,2160.04 -2258.86,2252.17 -2187.2,2252.17 J1-1.11@-2184.84,2254.53
CN1_12: CN1-1.12 J1-1.12 | length 946.1
  Top w7.87: CN1-1.12@-2476.18,2160.04 -2436.81,2199.41 -2342.32,2199.41 -2236.02,2305.71 -2136.02,2305.71 J1-1.12@-2084.84,2254.53
  Bottom w7.87: CN1-1.12@-2476.18,2160.04 -2436.02,2200.2 -2343.5,2200.2 -2237.6,2306.1 -2136.42,2306.1 J1-1.12@-2084.84,2254.53
CN1_13: CN1-1.13 J1-1.13 | length 499.4
  Top w7.87: CN1-1.13@-2397.44,2081.3 -2342.32,2081.3 -2275.39,2148.23 -2178.54,2148.23 J1-1.13@-2184.84,2154.53
  Bottom w7.87: CN1-1.13@-2397.44,2081.3 -2339.57,2081.3 -2271.06,2149.8 -2197.44,2149.8 -2191.54,2155.71 -2190.35,2154.53 J1-1.13@-2184.84,2154.53
CN1_14: CN1-1.14 J1-1.14 | length 944.1
  Top w7.87: CN1-1.14@-2476.18,2081.3 -2436.81,2120.67 -2358.07,2120.67 -2275.39,2203.35 -2121.85,2203.35 -2084.84,2166.34 J1-1.14@-2084.84,2154.53
  Bottom w7.87: CN1-1.14@-2476.18,2081.3 -2436.81,2120.67 -2361.61,2120.67 -2278.94,2203.35 -2116.73,2203.35 -2090.75,2177.36 -2090.75,2155.32 -2089.96,2154.53 J1-1.14@-2084.84,2154.53
CN1_15: CN1-1.15 J1-1.15 | length 473.1
  Top w7.87: CN1-1.15@-2397.44,2002.56 -2338.39,2002.56 -2283.27,2057.68 -2187.99,2057.68 J1-1.15@-2184.84,2054.53
  Bottom w7.87: CN1-1.15@-2397.44,2002.56 -2337.99,2002.56 -2283.27,2057.28 -2192.72,2057.28 -2189.96,2054.53 J1-1.15@-2184.84,2054.53
CN1_16: CN1-1.16 J1-1.16 | length 910.1
  Top w7.87: CN1-1.16@-2476.18,2002.56 -2437.2,2041.54 -2330.91,2041.54 -2267.52,2104.92 -2133.66,2104.92 -2084.84,2056.1 J1-1.16@-2084.84,2054.53
  Bottom w7.87: CN1-1.16@-2476.18,2002.56 -2437.2,2041.54 -2330.91,2041.54 -2267.52,2104.92 -2135.24,2104.92 J1-1.16@-2084.84,2054.53
CN1_17: CN1-1.17 J1-1.17 | length 458.5
  Top w7.87: CN1-1.17@-2397.44,1923.82 -2225,1923.82 -2189.57,1959.25 J1-1.17@-2184.84,1954.53
  Bottom w7.87: CN1-1.17@-2397.44,1923.82 -2225,1923.82 -2189.57,1959.25 J1-1.17@-2184.84,1954.53
CN1_18: CN1-1.18 J1-1.18 | length 894.2
  Top w7.87: CN1-1.18@-2476.18,1923.82 -2436.81,1963.19 -2302.95,1963.19 -2259.65,2006.5 -2136.81,2006.5 J1-1.18@-2084.84,1954.53
  Bottom w7.87: CN1-1.18@-2476.18,1923.82 -2436.81,1963.19 -2303.74,1963.19 -2260.43,2006.5 -2136.81,2006.5 J1-1.18@-2084.84,1954.53
CN1_19: CN1-1.19 J1-1.19 | length 453.7
  Top w7.87: CN1-1.19@-2397.44,1845.08 -2175.39,1845.08 J1-1.19@-2184.84,1854.53
  Bottom w7.87: CN1-1.19@-2397.44,1845.08 -2202.56,1845.08 -2191.54,1856.1 -2185.63,1856.1 -2185.63,1855.32 J1-1.19@-2184.84,1854.53
CN1_20: CN1-1.20 J1-1.20 | length 876
  Top w7.87: CN1-1.20@-2476.18,1845.08 -2436.81,1884.45 -2236.02,1884.45 -2214.37,1906.1 -2139.57,1906.1 -2094.29,1860.83 -2091.14,1860.83 J1-1.20@-2084.84,1854.53
  Bottom w7.87: CN1-1.20@-2476.18,1845.08 -2436.42,1884.84 -2235.63,1884.84 -2214.37,1906.1 -2138.78,1906.1 -2087.2,1854.53 J1-1.20@-2084.84,1854.53
CN1_21: CN1-1.21 J1-1.21 | length 435.9
  Top w7.87: CN1-1.21@-2397.44,1766.34 -2196.65,1766.34 J1-1.21@-2184.84,1754.53
  Bottom w7.87: CN1-1.21@-2397.44,1766.34 -2195.08,1766.34 -2195.08,1764.76 J1-1.21@-2184.84,1754.53
CN1_22: CN1-1.22 J1-1.22 | length 857.7
  Top w7.87: CN1-1.22@-2476.18,1766.34 -2436.81,1805.71 -2136.02,1805.71 J1-1.22@-2084.84,1754.53
  Bottom w7.87: CN1-1.22@-2476.18,1766.34 -2436.81,1805.71 -2136.02,1805.71 J1-1.22@-2084.84,1754.53
CN1_23: CN1-1.23 J1-1.23 | length 452.2
  Top w7.87: CN1-1.23@-2397.44,1687.6 -2267.52,1687.6 -2236.02,1656.1 -2188.78,1656.1 J1-1.23@-2184.84,1654.53
  Bottom w7.87: CN1-1.23@-2397.44,1687.6 -2267.52,1687.6 -2235.63,1655.71 -2188.78,1655.71 -2187.6,1654.53 J1-1.23@-2184.84,1654.53
CN1_24: CN1-1.24 J1-1.24 | length 879.7
  Top w7.87: CN1-1.24@-2476.18,1687.6 -2436.81,1726.97 -2247.83,1726.97 -2225.39,1704.53 -2158.46,1704.53 -2108.46,1654.53 J1-1.24@-2084.84,1654.53
  Bottom w7.87: CN1-1.24@-2476.18,1687.6 -2436.81,1726.97 -2247.83,1726.97 -2225,1704.13 -2156.89,1704.13 -2103.35,1650.59 -2086.81,1650.59 -2084.84,1652.56 J1-1.24@-2084.84,1654.53
CN1_25: CN1-1.25 J1-1.25 | length 470.2
  Top w7.87: CN1-1.25@-2397.44,1608.86 -2310.83,1608.86 -2256.5,1554.53 J1-1.25@-2184.84,1554.53
  Bottom w7.87: CN1-1.25@-2397.44,1608.86 -2312.01,1608.86 -2257.68,1554.53 J1-1.25@-2184.84,1554.53
CN1_26: CN1-1.26 J1-1.26 J12.1 | length 3558.6
  Top w7.87: CN1-1.26@-2476.18,1608.86 -2437.6,1647.44 -2270.67,1647.44 -2228.15,1604.92 -2135.24,1604.92 J1-1.26@-2084.84,1554.53
  Bottom w7.87: CN1-1.26@-2476.18,1608.86 -2437.6,1647.44 -2270.28,1647.44 -2228.15,1605.32 -2136.42,1605.32 -2085.63,1554.53 J1-1.26@-2084.84,1554.53
  Bottom w10: J12.1@-3461.02,3400 -3461.02,3180 -3386.02,3105 -2736.02,3105 -2676.02,3045 -2676.02,1660 -2624.88,1608.86 CN1-1.26@-2476.18,1608.86
CN1_27: CN1-1.27 J1-1.27 | length 487.8
  Top w7.87: CN1-1.27@-2397.44,1530.12 -2322.64,1530.12 -2247.05,1454.53 J1-1.27@-2184.84,1454.53
  Bottom w7.87: CN1-1.27@-2397.44,1530.12 -2321.85,1530.12 -2246.26,1454.53 J1-1.27@-2184.84,1454.53
CN1_28: CN1-1.28 J1-3.2 | length 2116.2
  Top w10: J1-3.2@-2486.02,3555 -2486.02,3435 -2556.02,3365 -2556.02,1560 -2526.14,1530.12 CN1-1.28@-2476.18,1530.12
CN1_29: CN1-1.29 J1-1.29 | length 506.4
  Top w7.87: CN1-1.29@-2397.44,1451.38 -2354.13,1451.38 -2259.65,1356.89 -2187.2,1356.89 J1-1.29@-2184.84,1354.53
  Bottom w7.87: CN1-1.29@-2397.44,1451.38 -2353.35,1451.38 -2258.07,1356.1 -2184.84,1356.1 J1-1.29@-2184.84,1354.53
CN1_30: CN1-1.30 J1-3.1 | length 2218.6
  Top w10: J1-3.1@-2636.02,3555 -2641.02,3550 -2641.02,3410 -2596.02,3365 -2596.02,1495 -2552.4,1451.38 CN1-1.30@-2476.18,1451.38
CN1_31: CN1-1.31 J1-1.31 | length 527
  Top w7.87: CN1-1.31@-2397.44,1372.64 -2351.77,1372.64 -2233.66,1254.53 J1-1.31@-2184.84,1254.53
  Bottom w7.87: CN1-1.31@-2397.44,1372.64 -2351.38,1372.64 -2233.27,1254.53 J1-1.31@-2184.84,1254.53 J1-1.31@-2180.91,1254.53
CN1_32: CN1-1.32 J1-1.32 | length 942.9
  Top w7.87: CN1-1.32@-2476.18,1372.64 -2438.54,1410.28 -2348.46,1410.28 -2243.5,1305.32 -2135.63,1305.32 J1-1.32@-2084.84,1254.53
  Bottom w7.87: CN1-1.32@-2476.18,1372.64 -2438.54,1410.28 -2348.07,1410.28 -2243.11,1305.32 -2135.63,1305.32 J1-1.32@-2084.84,1254.53
CN1_33: CN1-1.33 J1-1.33 | length 540.7
  Top w7.87: CN1-1.33@-2397.44,1293.9 -2350.2,1293.9 -2210.83,1154.53 J1-1.33@-2184.84,1154.53
  Bottom w7.87: CN1-1.33@-2397.44,1293.9 -2350.2,1293.9 -2210.83,1154.53 J1-1.33@-2184.84,1154.53
CN1_34: CN1-1.34 J1-1.34 | length 963.4
  Top w7.87: CN1-1.34@-2476.18,1293.9 -2436.81,1333.27 -2354.13,1333.27 -2225.39,1204.53 -2134.84,1204.53 J1-1.34@-2084.84,1154.53
  Bottom w7.87: CN1-1.34@-2476.18,1293.9 -2436.81,1333.27 -2354.13,1333.27 -2225.79,1204.92 -2135.24,1204.92 J1-1.34@-2084.84,1154.53
CN1_35: CN1-1.35 J1-1.35 | length 567.4
  Top w7.87: CN1-1.35@-2397.44,1215.16 -2360.43,1215.16 -2195.08,1049.8 -2189.57,1049.8 J1-1.35@-2184.84,1054.53
  Bottom w7.87: CN1-1.35@-2397.44,1215.16 -2360.83,1215.16 -2193.9,1048.23 -2191.14,1048.23 J1-1.35@-2184.84,1054.53
CN1_36: CN1-1.36 J1-1.36 | length 981
  Top w7.87: CN1-1.36@-2476.18,1215.16 -2436.81,1254.53 -2361.61,1254.53 -2212.8,1105.71 -2136.02,1105.71 J1-1.36@-2084.84,1054.53
  Bottom w7.87: CN1-1.36@-2476.18,1215.16 -2436.81,1254.53 -2362.4,1254.53 -2213.19,1105.32 -2135.63,1105.32 J1-1.36@-2084.84,1054.53
CN1_37: CN1-1.37 J1-1.37 | length 577.5
  Top w7.87: CN1-1.37@-2397.44,1136.42 -2220.28,959.25 -2189.57,959.25 J1-1.37@-2184.84,954.53
  Bottom w7.87: CN1-1.37@-2397.44,1136.42 -2213.58,952.56 -2186.81,952.56 J1-1.37@-2184.84,954.53
CN1_38: CN1-1.38 J1-1.38 | length 998.6
  Top w7.87: CN1-1.38@-2476.18,1136.42 -2436.81,1175.79 -2378.54,1175.79 -2208.07,1005.32 -2140.35,1005.32 -2098.23,963.19 -2093.5,963.19 J1-1.38@-2084.84,954.53
  Bottom w7.87: CN1-1.38@-2476.18,1136.42 -2436.81,1175.79 -2378.94,1175.79 -2208.46,1005.32 -2139.57,1005.32 -2088.78,954.53 J1-1.38@-2084.84,954.53
CN1_39: CN1-1.39 J1-1.39 | length 593.5
  Top w7.87: CN1-1.39@-2397.44,1057.68 -2204.53,864.76 -2195.08,864.76 J1-1.39@-2184.84,854.53
  Bottom w7.87: CN1-1.39@-2397.44,1057.68 -2194.29,854.53 J1-1.39@-2184.84,854.53
CN1_40: CN1-1.40 J1-1.40 | length 1038.1
  Top w7.87: CN1-1.40@-2476.18,1057.68 -2220.28,801.77 -2137.6,801.77 J1-1.40@-2084.84,854.53
  Bottom w7.87: CN1-1.40@-2476.18,1057.68 -2220.67,802.17 -2137.2,802.17 J1-1.40@-2084.84,854.53
CN2-1_P1: CN2-1.1 J2-1.1 | length 607.3
  Top w7.87: CN2-1.1@-3254.29,2553.46 -3234.61,2553.46 J2-1.1@-3033.82,2754.25
  Bottom w7.87: CN2-1.1@-3254.29,2553.46 -3063.35,2744.41 -3043.66,2744.41 J2-1.1@-3033.82,2754.25
CN2-1_P2: CN2-1.2 J2-1.2 | length 1087.2
  Top w7.87: CN2-1.2@-3333.03,2553.46 -3063.74,2822.76 -3002.32,2822.76 J2-1.2@-2933.82,2754.25
  Bottom w7.87: CN2-1.2@-3333.03,2553.46 -3064.53,2821.97 -3001.14,2821.97 -3001.14,2821.57 J2-1.2@-2933.82,2754.25 -2934.61,2753.46 J2-1.2@-2942.87,2753.46
CN2-1_P3: CN2-1.3 J2-1.3 | length 602
  Top w7.87: CN2-1.3@-3254.29,2474.72 -3222.8,2474.72 -3043.27,2654.25 J2-1.3@-3033.82,2654.25
  Bottom w7.87: CN2-1.3@-3254.29,2474.72 -3222.8,2474.72 -3058.62,2638.9 -3031.46,2638.9 -3033.82,2641.26 J2-1.3@-3033.82,2654.25
CN2-1_P4: CN2-1.4 J2-1.4 | length 1071.9
  Top w7.87: CN2-1.4@-3333.03,2474.72 -3293.66,2514.09 -3222.8,2514.09 -3159.8,2577.09 -3159.8,2600.71 -3057.44,2703.07 -2974.76,2703.07 -2933.82,2662.13 J2-1.4@-2933.82,2654.25
  Bottom w7.87: CN2-1.4@-3333.03,2474.72 -3294.45,2513.31 -3222.8,2513.31 -3160.98,2575.12 -3160.98,2598.74 -3056.65,2703.07 -2970.04,2703.07 -2928.7,2661.73 -2928.7,2659.37 J2-1.4@-2933.82,2654.25
CN2-1_P5: CN2-1.5 J2-1.5 | length 572.5
  Top w7.87: CN2-1.5@-3254.29,2395.98 -3230.67,2395.98 -3073.19,2553.46 -3033.82,2553.46 J2-1.5@-3033.82,2554.25
  Bottom w7.87: CN2-1.5@-3254.29,2395.98 -3230.28,2395.98 -3074.37,2551.89 -3036.18,2551.89 J2-1.5@-3033.82,2554.25
CN2-1_P6: CN2-1.6 J2-1.6 | length 1014
  Top w7.87: CN2-1.6@-3333.03,2395.98 -3292.87,2436.14 -3222.8,2436.14 -3053.9,2605.04 -2984.61,2605.04 J2-1.6@-2933.82,2554.25
  Bottom w7.87: CN2-1.6@-3333.03,2395.98 -3292.87,2436.14 -3222.4,2436.14 -3053.11,2605.43 -2985,2605.43 J2-1.6@-2933.82,2554.25
CN2-1_P7: CN2-1.7 J2-1.7 | length 554.4
  Top w7.87: CN2-1.7@-3254.29,2317.24 -3222.8,2317.24 -3085.79,2454.25 J2-1.7@-3033.82,2454.25
  Bottom w7.87: CN2-1.7@-3254.29,2317.24 -3223.19,2317.24 -3086.18,2454.25 J2-1.7@-3033.82,2454.25
CN2-1_P8: CN2-1.8 J2-1.8 | length 1015.9
  Top w7.87: CN2-1.8@-3333.03,2317.24 -3293.66,2356.61 -3214.92,2356.61 -3066.54,2505 -2969.61,2505 -2933.82,2469.21 J2-1.8@-2933.82,2454.25
  Bottom w7.87: CN2-1.8@-3333.03,2317.24 -3293.27,2357.01 -3214.53,2357.01 -3066.1,2505.43 -2970.04,2505.43 -2931.46,2466.85 -2931.46,2456.61 J2-1.8@-2933.82,2454.25
CN2-1_P9: CN2-1.9 J2-1.9 | length 537.3
  Top w7.87: CN2-1.9@-3254.29,2238.5 -3207.05,2238.5 -3091.3,2354.25 J2-1.9@-3033.82,2354.25
  Bottom w7.87: CN2-1.9@-3254.29,2238.5 -3206.26,2238.5 -3091.3,2353.46 -3033.82,2353.46 J2-1.9@-3033.82,2354.25
CN2-1_P10: CN2-1.10 J2-1.10 | length 1007
  Top w7.87: CN2-1.10@-3333.03,2238.5 -3293.66,2277.87 -3203.11,2277.87 -3077.13,2403.86 -2970.83,2403.86 -2935.39,2368.43 -2935.39,2355.83 J2-1.10@-2933.82,2354.25
  Bottom w7.87: CN2-1.10@-3333.03,2238.5 -3293.27,2278.27 -3201.93,2278.27 -3076.73,2403.46 -2969.65,2403.46 -2927.91,2361.73 -2927.91,2349.13 -2928.7,2349.13 J2-1.10@-2933.82,2354.25
CN2-1_P11: CN2-1.11 J2-1.11 | length 541.4
  Top w7.87: CN2-1.11@-3254.29,2159.76 -3203.11,2159.76 -3100.75,2262.13 -3037.76,2262.13 -3033.82,2258.19 J2-1.11@-3033.82,2254.25
  Bottom w7.87: CN2-1.11@-3254.29,2159.76 -3205.08,2159.76 -3102.32,2262.52 -3032.64,2262.52 -3032.64,2255.43 J2-1.11@-3033.82,2254.25
CN2-1_P12: CN2-1.12 J2-1.12 | length 972
  Top w7.87: CN2-1.12@-3333.03,2159.76 -3293.66,2199.13 -3207.05,2199.13 -3103.11,2303.07 -2999.96,2303.07 -2939.33,2242.44 -2933.82,2247.95 J2-1.12@-2933.82,2254.25
  Bottom w7.87: CN2-1.12@-3333.03,2159.76 -3293.66,2199.13 -3208.23,2199.13 -3104.69,2302.68 -2999.17,2302.68 -2949.17,2252.68 -2935.39,2252.68 J2-1.12@-2933.82,2254.25
CN2-1_P13: CN2-1.13 J2-1.13 | length 501.6
  Top w7.87: CN2-1.13@-3254.29,2081.02 -3199.17,2081.02 -3128.31,2151.89 -3036.18,2151.89 J2-1.13@-3033.82,2154.25
  Bottom w7.87: CN2-1.13@-3254.29,2081.02 -3197.99,2081.02 -3127.52,2151.5 -3036.57,2151.5 J2-1.13@-3033.82,2154.25
CN2-1_P14: CN2-1.14 J2-1.14 | length 941.3
  Top w7.87: CN2-1.14@-3333.03,2081.02 -3293.66,2120.39 -3199.17,2120.39 -3116.1,2203.46 -2983.03,2203.46 J2-1.14@-2933.82,2154.25
  Bottom w7.87: CN2-1.14@-3333.03,2081.02 -3292.87,2121.18 -3197.99,2121.18 -3114.92,2204.25 -2983.82,2204.25 J2-1.14@-2933.82,2154.25
CN2-1_P15: CN2-1.15 J2-1.15 | length 484
  Top w7.87: CN2-1.15@-3254.29,2002.28 -3195.24,2002.28 -3143.27,2054.25 J2-1.15@-3033.82,2054.25
  Bottom w7.87: CN2-1.15@-3254.29,2002.28 -3195.24,2002.28 -3143.27,2054.25 J2-1.15@-3033.82,2054.25